# Altium PCB PCB_Updated.PcbDoc
Units mm, origin at the board's own origin, x right, y up, seen from the top; angles counter-clockwise.
Board outline 80 x 85 mm, 2 copper layers (Top Layer, Bottom Layer); 18 components, 12 nets, 89 pads, 5 vias.
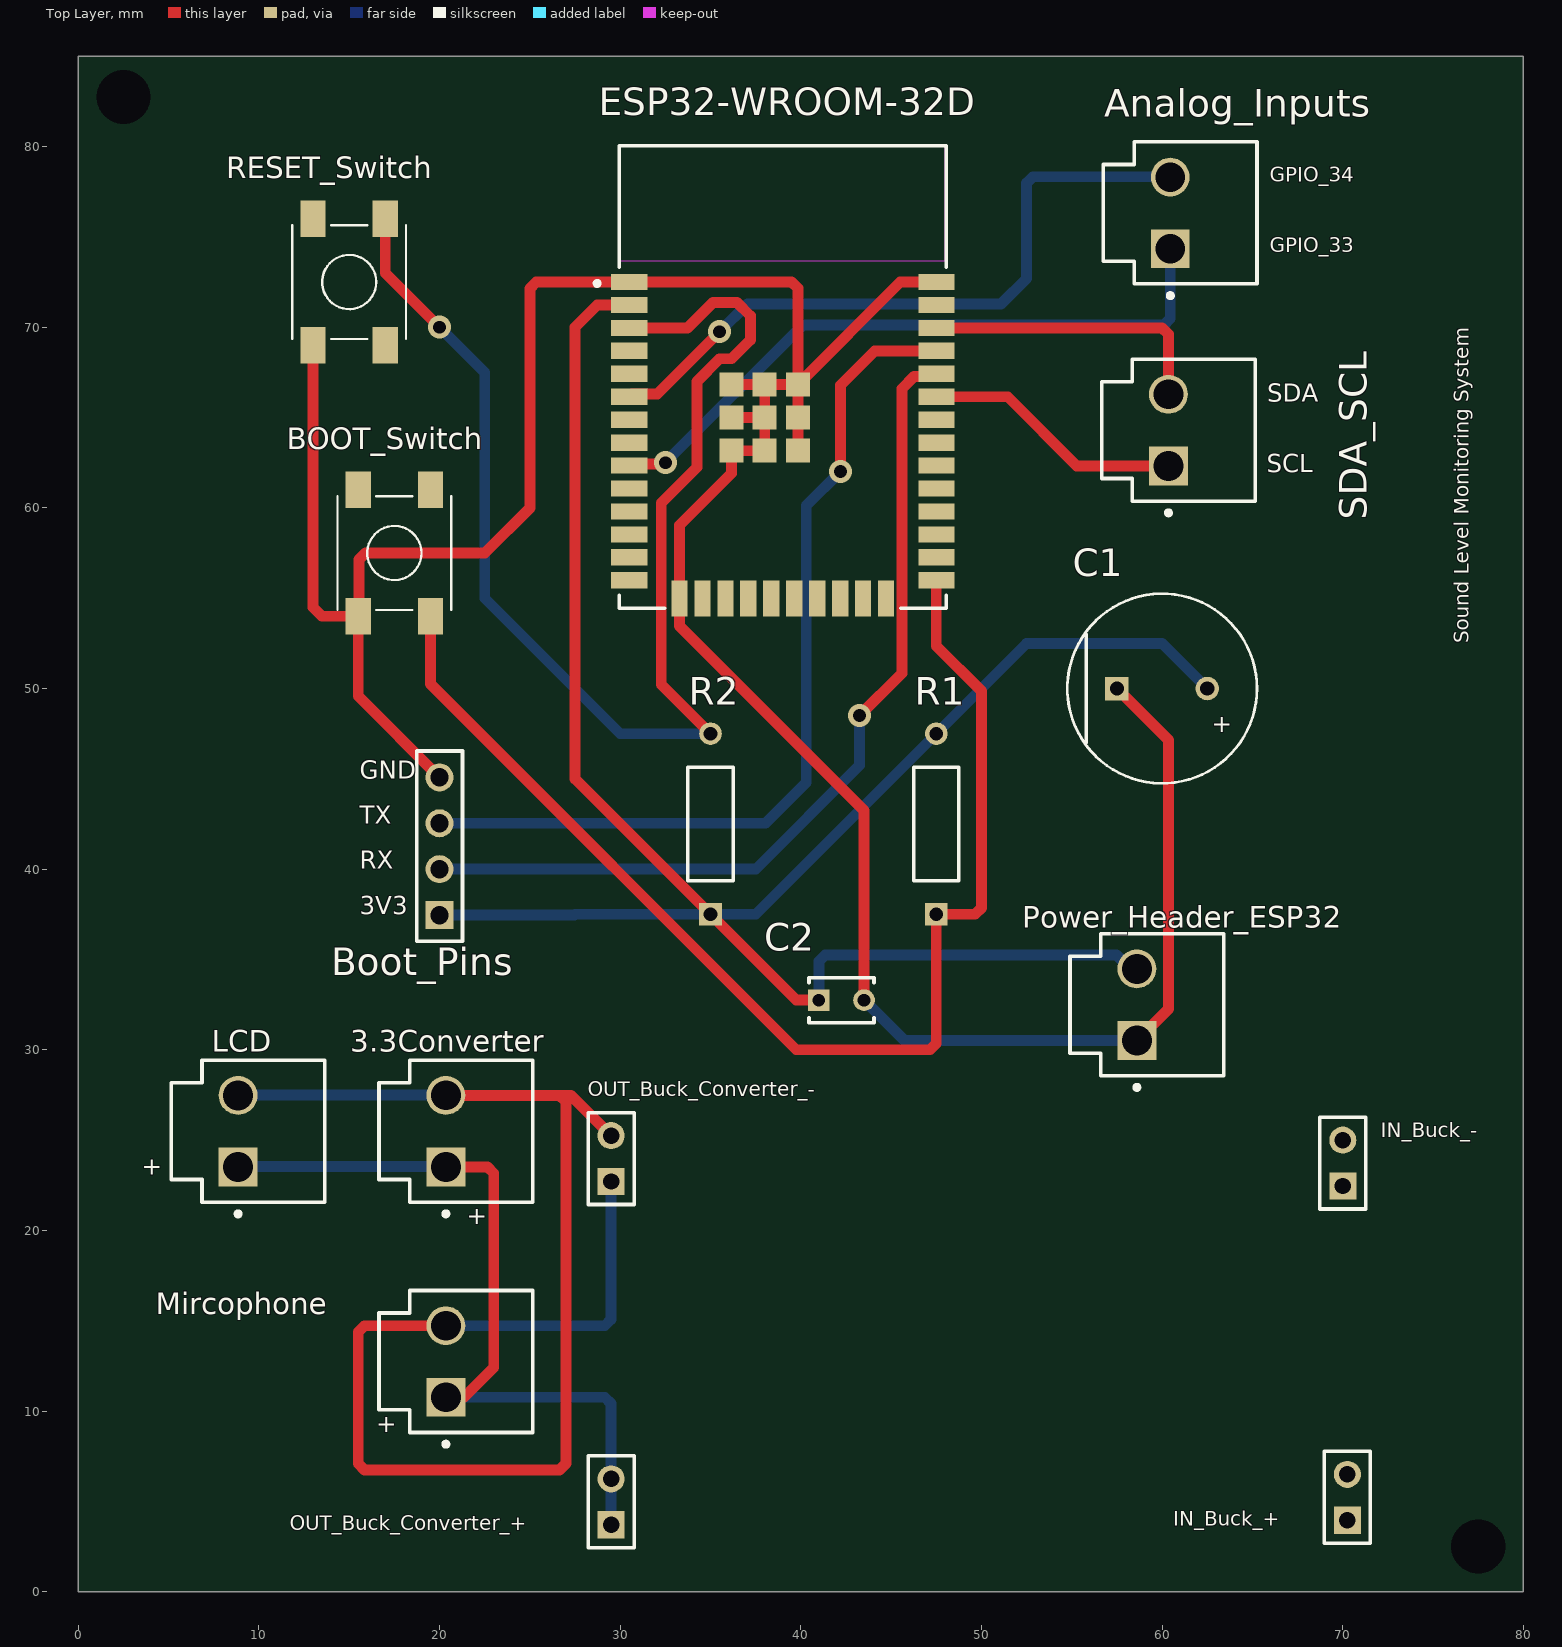
[diagram p0: Top Layer view]
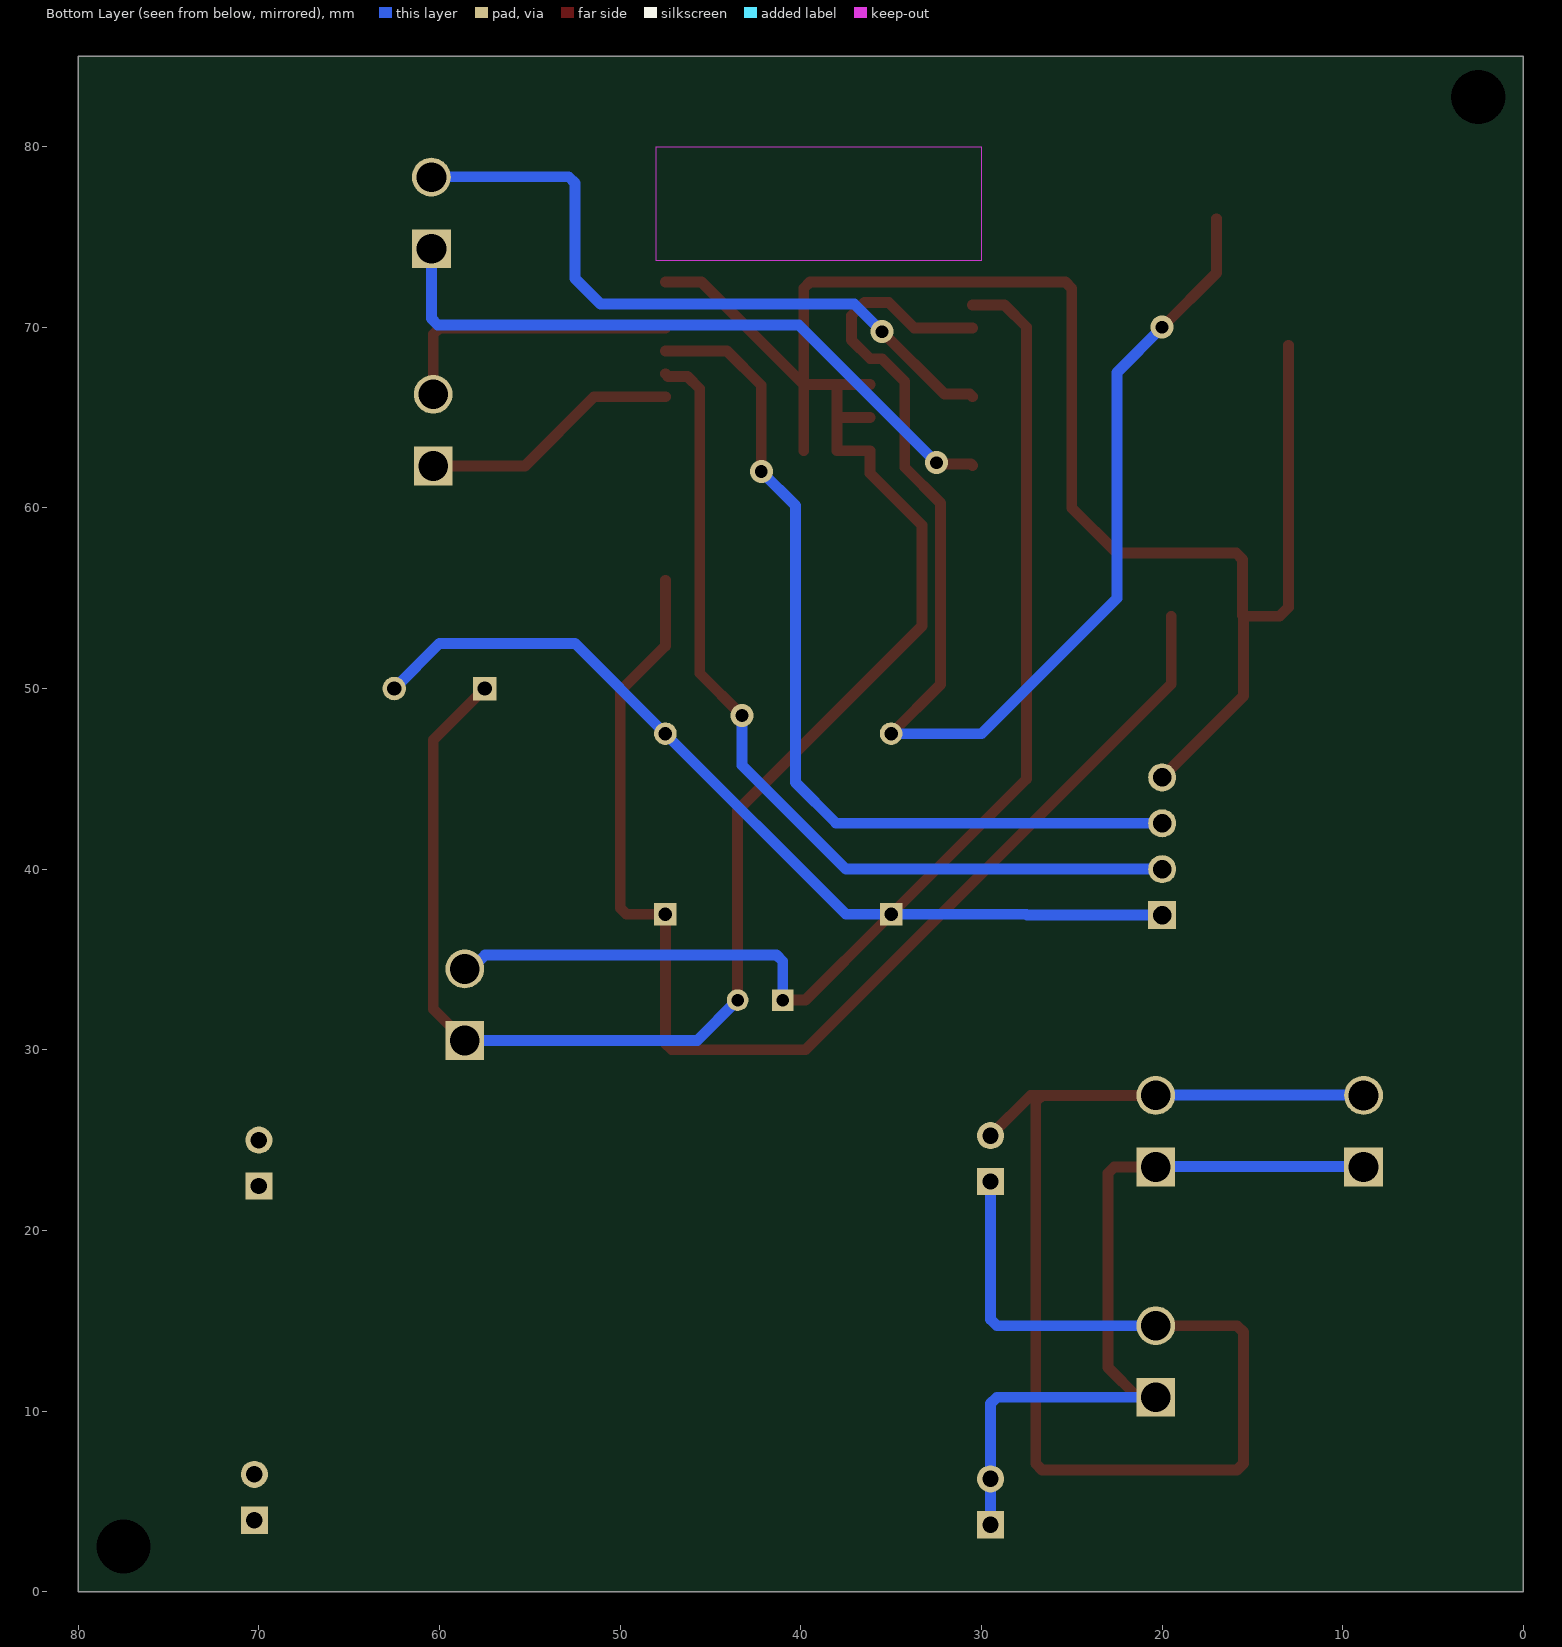
[diagram p1: Bottom Layer view, seen from below]
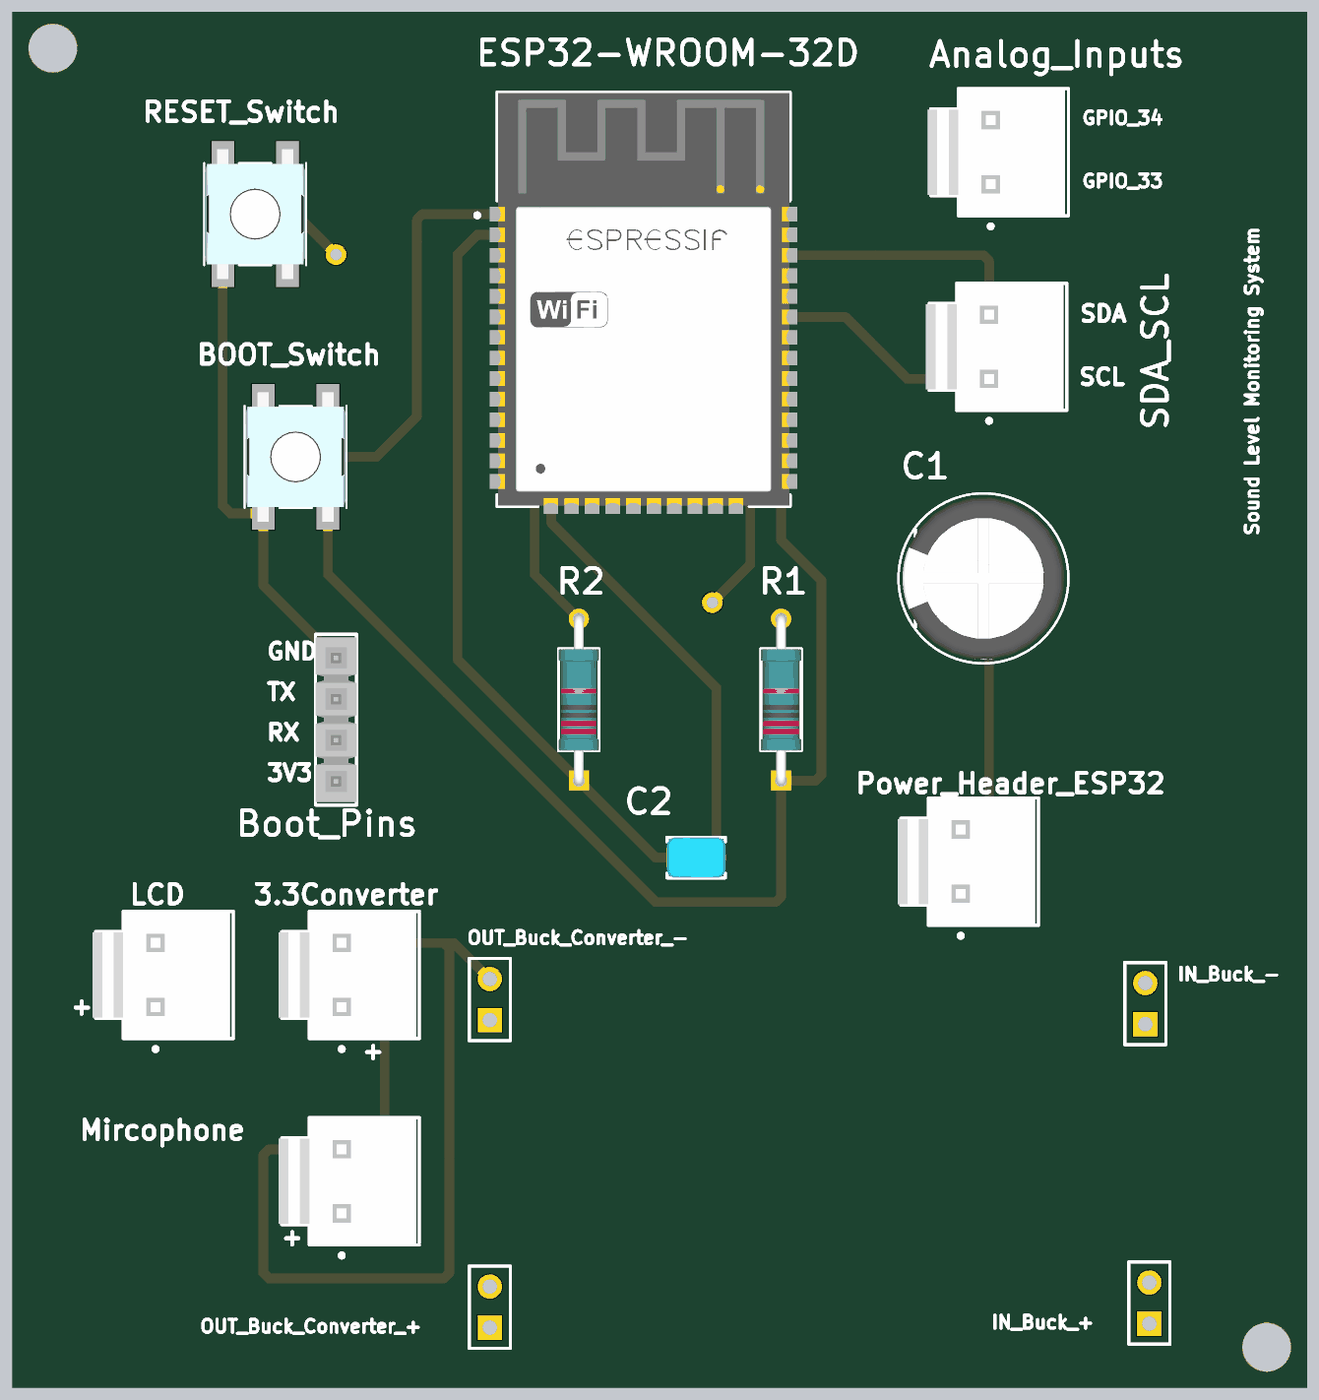
[diagram p2: 3D render of the assembled board from above, using the file's embedded part models]

## Layer stack, top to bottom
Top Solder: solder mask 0.0102, Solder Resist, Dk 3.5
Top Layer: signal copper 0.0356
Dielectric 1: dielectric 0.32, FR-4, Dk 4.8
Bottom Layer: signal copper 0.0356
Bottom Solder: solder mask 0.0102, Solder Resist, Dk 3.5

## Board outline
0,0 80,0 80,85 0,85

## Design rules (kind name [scope] priority, off if disabled: settings)
BoardOutlineClearance [All] p1: gap=0.2 ignorepadtopadclearanceinfootprint=FALSE
Clearance [All] p1: gap=0.127 ignorepadtopadclearanceinfootprint=FALSE except(0.25: Arc-Hole Track-Hole SMDPad-Hole THPad-Hole Via-Hole Fill-Hole Poly-Hole Region-Hole Text-Hole)
ComponentClearance [All] p1: gap=0.127 collisioncheckmode=3 verticalgap=0.127 showdistances=TRUE
DiffPairsRouting [All] p1: maxlimit=0.254 minlimit=0.127 mostfreqgap=0.127 toplayer_minwidth=0.127 toplayer_maxwidth=25.4 toplayer_prefwidth=0.127 bottomlayer_minwidth=0.127 bottomlayer_maxwidth=25.4 bottomlayer_prefwidth=0.127 maxuncoupledlength=12.7
Height [All] p1: minheight=0 maxheight=1816.048 prefheight=12.7
HoleSize [All] p1: absolutevalues=TRUE maxlimit=6.3 minlimit=0.3 maxpercent=80.000 minpercent=20.000
HoleToHoleClearance [All] p1: gap=0.25 allowstackedmicrovias=FALSE
MinimumAnnularRing [All] p1: minimumring=0.076
MinimumSolderMaskSliver [All] p1: minsoldermaskwidth=0
PlaneClearance [All] p1: clearance=0.127
PlaneConnect PlaneConnectPowerPads [InPadClass('PowerPads')] p1: planeconnectstyle=Direct reliefexpansion=0.508 reliefentries=4 reliefconductorwidth=0.254 reliefairgap=0.254
PlaneConnect [All] p2: pad.planeconnectstyle=Relief pad.reliefexpansion=0.3 pad.reliefentries=4 pad.reliefconductorwidth=0.127 pad.reliefairgap=0.127 via.planeconnectstyle=Direct via.reliefexpansion=0.3 via.reliefentries=4 via.reliefconductorwidth=0.127 via.reliefairgap=0.127
PolygonConnect PolygonConnectPowerPads [All vs (InPadClass('PowerPads'))] p1: connectstyle=Direct reliefconductorwidth=0.254 reliefentries=4 polygonreliefangle="90 Angle" airgapwidth=0.254
PolygonConnect [All] p2: thpad.connectstyle=Relief thpad.reliefconductorwidth=0.127 thpad.reliefentries=4 thpad.polygonreliefangle="90 Angle" thpad.airgapwidth=0.127 smdpad.connectstyle=Relief smdpad.reliefconductorwidth=0.127 smdpad.reliefentries=4 smdpad.polygonreliefangle="90 Angle" smdpad.airgapwidth=0.127 via.connectstyle=Direct via.reliefconductorwidth=0.127 via.reliefentries=4 via.polygonreliefangle="90 Angle" via.airgapwidth=0.127
RoomDefinition V3 [InComponentClass('V3')] p1: confinementstyle=ConfineIn formatcopy=TRUE lockcomponents=FALSE outline -0.225,0.05 80.125,0.05 80.125,85.125 -0.225,85.125
RoutingVias [All] p1: holewidth=0.3 width=0.6 viastyle="Through Hole" minholewidth=0.3 minwidth=0.6 maxholewidth=0.6 maxwidth=6.6
SilkToSilkClearance [All] p1: silktosilkclearance=0
SilkToSolderMaskClearance [IsPad] p1: minsilkscreentomaskgap=0.127 clearancetoexposedcopper=TRUE
SolderMaskExpansion [All] p1: expansion=0.075 istentingtop=FALSE
Width [All] p1: maxlimit=25.4 minlimit=0.127 preferedwidth=0.6 minimp=50.000000 maximp=50.000000 favimp=50.000000
20 further rules are at their usual default settings.

## Components (designator, comment, footprint, x,y, rotation, side; value= is the part's Value field where it differs from the comment)
3.3Converter "B2P-VH(LF)(SN)" JST-B2P-VH(LF)(SN)_V 21.75,25.5 r90 top
Analog_Inputs "B2P-VH(LF)(SN)" JST-B2P-VH(LF)(SN)_V 61.85,76.325 r90 top
Boot_Pins "TSW-104-08-L-S" SMTC-TSW-104-08-X-S 20,37.46 r90 top
BOOT_Switch "430471025826" 430471025826 17.5,57.5 r90 top
C1 "10uF" FP-RAD-TH-D_10_0_5-L_16_1-MFG 60,50 r0 top
C2 "0.1uF" FP-RCE0DB-MFG 42.25,32.75 r0 top
ESP32-WROOM-32D "ESP32-WROOM-32D" FP-ESP32-WROOM-32D-MFG 39,67.24 r0 top
IN_Buck_+ "Header 2" HDR1X2 70.25,3.96 r90 top
IN_Buck_- "Header 2" HDR1X2 70,22.46 r90 top
LCD "B2P-VH(LF)(SN)" JST-B2P-VH(LF)(SN)_V 10.25,25.5 r90 top
Mircophone "B2P-VH(LF)(SN)" JST-B2P-VH(LF)(SN)_V 21.75,12.75 r90 top
OUT_Buck_Converter_+ "Header 2" HDR1X2 29.5,3.71 r90 top
OUT_Buck_Converter_- "Header 2" HDR1X2 29.5,22.71 r90 top
Power_Header_ESP32 "B2P-VH(LF)(SN)" JST-B2P-VH(LF)(SN)_V 60,32.5 r90 top
R1 "10k" FP-MBB0207-MFG 47.5,42.5 r90 top
R2 "10k" FP-MBB0207-MFG 35,42.5 r90 top
RESET_Switch "430471025826" 430471025826 15,72.5 r90 top
SDA_SCL "B2P-VH(LF)(SN)" JST-B2P-VH(LF)(SN)_V 61.75,64.305 r90 top

## Footprints (in the part's own frame and the unit in brackets; to place one, negate y for a bottom-side part, rotate by r counter-clockwise, add the part's x,y. Pads: shape width x height; smd on the part's side, far side on the other; paste and mask are expansions set on the pad)
430471025826 [mm] "6*6mm vertical type,SMD, height 2.5mm, white actuator, 260gf, T&R"
  rect 2x1.4 smd: 1(-3.5,2) 2(3.5,2) 3(-3.5,-2) 4(3.5,-2)
  silkscreen extent -3.15,-3.15 3.15,3.15, body extent -4,-3.1 4,3.1, height 2.49
FP-ESP32-WROOM-32D-MFG [mm]
  rect 2x0.9 smd paste+0 mask+0: 1(-8.5,5.26) 2(-8.5,3.99) 3(-8.5,2.72) 4(-8.5,1.45) 5(-8.5,0.18) 6(-8.5,-1.09) 7(-8.5,-2.36) 8(-8.5,-3.63) 9(-8.5,-4.9) 10(-8.5,-6.17) 11(-8.5,-7.44) 12(-8.5,-8.71) 13(-8.5,-9.98) 14(-8.5,-11.25) 25(8.5,-11.25) 26(8.5,-9.98) 27(8.5,-8.71) 28(8.5,-7.44) 29(8.5,-6.17) 30(8.5,-4.9) 31(8.5,-3.63) 32(8.5,-2.36) 33(8.5,-1.09) 34(8.5,0.18) 35(8.5,1.45) 36(8.5,2.72) 37(8.5,3.99) 38(8.5,5.26)
  rect 0.9x2 smd paste+0 mask+0: 15(-5.715,-12.25) 16(-4.445,-12.25) 17(-3.175,-12.25) 18(-1.905,-12.25) 19(-0.635,-12.25) 20(0.635,-12.25) 21(1.905,-12.25) 22(3.175,-12.25) 23(4.445,-12.25) 24(5.715,-12.25)
  rect 1.33x1.33 smd paste+0 mask+0: 39(-2.835,-4.075) 39(-2.835,-2.24) 39(-2.835,-0.405) 39(-1,-4.075) 39(-1,-2.24) 39(-1,-0.405) 39(0.835,-4.075) 39(0.835,-2.24) 39(0.835,-0.405)
  Keep-Out Layer region: -9,6.45 9,6.45 9,12.75 -9,12.75
  Keep-Out Layer region: -9,6.45 9,6.45 9,12.75 -9,12.75
  silkscreen extent -10.4,-12.8 9.05,12.8, body extent -9.6,-13.35 9.6,12.9, height 0.25
FP-MBB0207-MFG [mm]
  rect 1.25x1.25 hole 0.75 paste-1000 mask+0: 1(-5,0)
  round 1.25 hole 0.75 paste-1000 mask+0: 2(5,0)
  silkscreen extent -3.15,-1.25 3.15,1.25, body extent -5.72,-1.35 5.72,1.35, height 0.25
FP-RAD-TH-D_10_0_5-L_16_1-MFG [mm]
  rect 1.3x1.3 hole 0.8 paste-1000 mask+0: 1(-2.5,0)
  round 1.3 hole 0.8 paste-1000 mask+0: 2(2.5,0)
  silkscreen extent -5.25,-5.25 5.25,5.25, body extent -5.35,-5.35 5.35,5.35, height 0.25
FP-RCE0DB-MFG [mm]
  rect 1.2x1.2 hole 0.7 paste-1000 mask+0: 1(-1.25,0)
  round 1.2 hole 0.7 paste-1000 mask+0: 2(1.25,0)
  silkscreen extent -1.8,-1.25 1.8,1.25, body extent -1.95,-1.35 1.95,1.35, height 0.25
HDR1X2 [mm] "Connector; Header; 2 Position"
  rect 1.5x1.5 hole 0.9: 1(0,0)
  round 1.5 hole 0.9: 2(2.54,0)
  silkscreen extent -1.27,-1.27 3.81,1.27
JST-B2P-VH(LF)(SN)_V [mm] "THD, 2-Leads, Body 8.5x7.86mm, Pitch 3.96mm"
  rect 2.15x2.15 hole 1.65: 1(-1.98,1.4)
  round 2.15 hole 1.65: 2(1.98,1.4)
  silkscreen extent -4.7,-3.4 3.93,5.1, body extent -3.93,-3.2 3.93,5.3, height 10.9
SMTC-TSW-104-08-X-S [mm] ".025 SQ Post Terminal Strip Assembly, 1x4 Pins, Vertical, 2.54mm Pitch, Male"
  rect 1.55x1.55 hole 1.02: 1(0,0)
  round 1.55 hole 1.02: 2(2.54,0) 3(5.08,0) 4(7.62,0)
  silkscreen extent -1.46,-1.27 9.08,1.27, body extent -1.27,-1.27 8.89,1.27, height 8.38

## Part data
3.3Converter Analog_Inputs LCD Mircophone Power_Header_ESP32 SDA_SCL: library part CMP-002-00025-2, "Male Header, Pitch 3.96 mm, 1 x 2 Position, Height 10.9 mm, Tail Length 3.7 mm, -25 to 85 degC, RoHS, Bulk", Manufacturer=JST, Max Operating Temperature=85°C, Min Operating Temperature=-25°C, Package Description="Male Header, Pitch 3.96 mm, 1 x 2 Position, Height 10.9 mm, Tail Length 3.7 mm", Case/Package=B2P-VH(LF)(SN), Connector Type=Header, Datasheet URL=http://www.jst-mfg.com/product/pdf/eng/eVH.pdf, Datasheet Version=May-16, Gender=Male, Manufacturer URL=http://www.jst.com/home2.html, Mounting Technology=TH, Package Reference=B2P-VH(LF)(SN), RoHS Compliant=Unknown
Boot_Pins: library part CMP-1024-00358-1, "0.025\" SQ Post Header, Through-hole, Vertical, -55 to 125 degC, 2.54 mm Pitch, 4-Pin, Male, RoHS", Manufacturer=Samtec, Temperature Range="-55 to 125 degC", ComponentLink1Description="Manufacturer URL", ComponentLink1URL=http://www.samtec.com, ComponentLink2Description=Datasheet, ComponentLink2URL=http://www.samtec.com/documents/webfiles/pdf/TSW_TH.PDF, ComponentLink3Description="Package Specification", ComponentLink3URL=http://www.samtec.com/documents/webfiles/cpdf/TSW-XXX-XX-XXX-X-XX-XXX-MKT.pdf, DatasheetVersion=F-214, Mounting Technology=Through-hole, Orientation=Vertical, PackageDescription=".025[0.64] SQ. Post Terminal Strip Assembly", PackageReference=TSW-104-08-X-S, PackageVersion="DM, 8/1988", PartNumber=TSW-104-08-L-S, Pitch="2.54 mm", RoHS=True
BOOT_Switch RESET_Switch: library part CMP-1452-00022-1, "WS-TASV SMD Tact Switch 6X6 mm", Manufacturer="Wuerth Elektronik", ComponentLink1Description="Manufacturer URL", ComponentLink1URL=http://www.we-online.com, ComponentLink2Description=Datasheet, ComponentLink2URL=http://katalog.we-online.de/em/datasheet/4304x1.pdf, NoPins=04, PackageReference=430471025826, PartNumber=430471025826
C1: library part CMP-05427-000979-1, "Aluminum Electrolytic Capacitors (Radial Lead Type) AEC-Q200 Qualified 1000uF ±20% 10V", Capacitance=1mF, Case/Package=Radial, Dielectric Material=Aluminium, ESR (Equivalent Series Resistance)=68mR, Leakage Current=3uA, Max Operating Temperature=105°C, Min Operating Temperature=-55°C, Package Quantity=200, Ratings=AEC-Q200, Ripple Current=1.05A, Tolerance=20%, Voltage=10V, Construction=RADIAL, Contact Plating=Tin, Diameter=10mm, Height=16mm, Height - Seated (Max)=0.63inch, Impedance=68mR, Lead Diameter=0.6mm, Lead Free="Lead Free", Lead Pitch=5mm, Length=16mm, Life (Hours)=3000Hour, Mount="Through Hole", Packaging=Bulk, Radiation Hardening=No, REACH SVHC="No SVHC", RoHS Compliant=Yes, Series=FC, Size=16mm, Termination=Radial, Voltage Rating=10V, Voltage Rating (DC)=10V
C2: library part CMP-06035-048089-1, "Cap Ceramic 100nF 50V X7R ±10% Radial 2.5mm +125°C Ammo Pack", Capacitance=100nF, Case/Package=Radial, Dielectric=X7R, Max Operating Temperature=125°C, Min Operating Temperature=-55°C, Package Quantity=2000, Ratings=AEC-Q200, Resistor Type=Ceramic, Tolerance=10%, Voltage Rating=50V, Height=3.5mm, Height - Seated (Max)=0.138inch, Lead Diameter=0.5mm, Lead Free="Lead Free", Lead Pitch=0.098inch, Lead/Base Style=Straight, Length=0.142inch, Mount="Through Hole", Packaging="Tape and Reel", Termination=Radial, Voltage Rating (DC)=50V, Width=0.098inch
ESP32-WROOM-32D: library part CMP-194065-000003-1, "WIFI MODULE 32MBITS SPI FLASH", Manufacturer="Espressif Systems", Max Frequency=2484MHz, Max Supply Voltage=3.6V, Min Supply Voltage=3V, Nominal Supply Current=500mA, Temperature="-40°C to +85°C", Temperature Range High=+85°C, Temperature Range Low=-40°C, Automotive=No, Bandwidth=72MHz, Category=UNK, ComponentLink2Description=Datasheet, ComponentLink2URL=https://www.espressif.com/sites/default/files/documentation/esp32-wroom-32d_esp32-wroom-32u_datasheet_en.pdf, Data Rate=150Mbits/s, Device Class L1="Integrated Circuits (ICs)", Device Class L2="RF Semiconductors and Devices", Device Class L3=Transceivers, Digikey Description="WIFI MODULE 32MBITS SPI FLASH", Height=3.2mm, Interface=I2C,SPI,UART,Ethernet,I2S,Other, Lead Free=Yes, Manufacturer Part Number=ESP32-WROOM-32D, Mouser Description="Wi-Fi/BT BLE Module ESP32-D0WD, SPI Flash, UART, P", Number Of Adc Channels=16, Number Of Gpio=32, Octopart=https://octopart.com/esp32-wroom-32d-espressif+systems-91040050, Package=ESP32-WROOM-32D, RoHS=TRUE, Sensitivity=-98dBm
IN_Buck_+ IN_Buck_- OUT_Buck_Converter_+ OUT_Buck_Converter_-: library part CMP-307-000070-1, "Header, 2-Pin", Component Type=Standard, Design Item ID="Header 2", LatestRevisionDate=17-Jul-2002, LatestRevisionNote="Re-released for DXP Platform.", Pin Count=2, Publisher="Altium Limited", Source="Miscellaneous Connectors.SchLib"
R1 R2: library part CMP-02408-000035-1, "RES 10K OHM 0.6W 1% AXIAL", Case/Package=Conformal, Max Operating Temperature=155°C, Max Power Dissipation=600mW, Min Operating Temperature=-55°C, Resistance=10kR, Resistance Tolerance=1%, Resistor Type="Metal Film", Temperature Coefficient=50ppm/°C, Voltage Rating=300V, Construction=Cylindrical, Contact Plating=Tin, Diameter=2.5mm, Features="Automotive AEC-Q200", Lead Free="Lead Free", Length=6.5mm, Military Standard=Not, Number of Terminations=2, Packaging="Tape and Reel", Power Rating=600mW, Radiation Hardening=No, RoHS Compliant=Yes, Series="MBB 0207 - Professional", Technology="THIN FILM", Termination=Axial, Tolerance=1%, Voltage Rating (DC)=300V

## Free pads (board coordinates)
  round 1.524 hole 3: 14(2.5,82.75) 15(77.5,2.5)

## Via types
v1: diameter 1.27, hole 0.711, Top Layer to Bottom Layer, 5 vias

## Nets (pads, with @x,y where several pads share a name; then routed paths per layer and width w, separated by ;. In a path a pad name is that pad's centre, name@x,y a point inside that pad or via, vN(x,y) a via of type N, cw(c..) or ccw(c..) an arc to the next point about the centre after c; other vN are vias at no path point)
3V3: Boot_Pins.1 C1.2 C2.1 ESP32-WROOM-32D.2 Power_Header_ESP32.2 R1.2 R2.1 | length 117.1
  Top Layer w0.6: ESP32-WROOM-32D.2 28.73,71.23 27.5,70 27.5,45 R2.1 35.325,37.175 39.75,32.75 C2.1
  Bottom Layer w0.6: Boot_Pins.1 27.476,37.46 27.516,37.5 R2.1 37.5,37.5 R1.2 52.5,52.5 60,52.5 C1.2 ; C2.1 41,34.899 41.351,35.25 57.474,35.25 58.244,34.48 Power_Header_ESP32.2
A_I_1: Analog_Inputs.1 ESP32-WROOM-32D.9 | length 37.2
  Top Layer w0.6: ESP32-WROOM-32D.9 30.58,62.42 32.42,62.42 v1(32.5,62.5)
  Bottom Layer w0.6: v1(32.5,62.5) 32.5,62.512 40.113,70.125 60.099,70.125 60.45,70.476 Analog_Inputs.1
A_I_2: Analog_Inputs.2 ESP32-WROOM-32D.6 | length 38.1
  Top Layer w0.6: ESP32-WROOM-32D.6 30.65,66.3 32.05,66.3 v1(35.5,69.75)
  Bottom Layer w0.6: v1(35.5,69.75) 37.04,71.29 51.088,71.29 52.5,72.701 52.5,77.974 52.851,78.325 Analog_Inputs.2@60.45,78.325
GND: Boot_Pins.4 BOOT_Switch.1 C1.1 C2.2 ESP32-WROOM-32D.1 ESP32-WROOM-32D.15 ESP32-WROOM-32D.38 ESP32-WROOM-32D.39 Power_Header_ESP32.1 RESET_Switch.1 | length 172.3
  Top Layer w0.6: RESET_Switch.1 13,54.5 13.5,54 BOOT_Switch.1 ; Boot_Pins.4 15.5,49.58 BOOT_Switch.1 ; ESP32-WROOM-32D.39@36.165,65 ESP32-WROOM-32D.39@38,65 ; ESP32-WROOM-32D.39@36.165,66.835 ESP32-WROOM-32D.39@38,66.835 ; ESP32-WROOM-32D.39@39.835,63.165 39.835,65 ESP32-WROOM-32D.39@39.835,66.835 ; C2.2 43.5,43.25 33.285,53.465 ESP32-WROOM-32D.15 33.285,59.035 36.165,61.915 36.165,63.165 38,63.165 ESP32-WROOM-32D.39@38,65 ; ESP32-WROOM-32D.38 45.5,72.5 ESP32-WROOM-32D.39@39.835,66.835 ; C1.1 60.344,47.156 60.344,32.264 Power_Header_ESP32.1 ; BOOT_Switch.1 15.549,54.049 15.549,57.149 15.9,57.5 22.5,57.5 25,60 25,72.149 25.351,72.5 ESP32-WROOM-32D.1 39.49,72.5 39.835,72.155 ESP32-WROOM-32D.39@39.835,66.835 ; ESP32-WROOM-32D.39@38,65 ESP32-WROOM-32D.39@38,66.835 ; ESP32-WROOM-32D.39@38,66.835 ESP32-WROOM-32D.39@39.835,66.835
  Bottom Layer w0.6: C2.2 45.73,30.52 Power_Header_ESP32.1
Net3.3Converter_1: 3.3Converter.1 LCD.1 Mircophone.1 OUT_Buck_Converter_+.1 OUT_Buck_Converter_+.2 | length 43.2
  Top Layer w0.6: Mircophone.1@19.746,10.166 Mircophone.1 ; 3.3Converter.1 22.649,23.52 23,23.169 23,12.42 Mircophone.1@21.35,10.77
  Bottom Layer w0.6: LCD.1@8.85,23.54 20.33,23.54 3.3Converter.1 ; Mircophone.1@21.35,10.77 29.149,10.77 29.5,10.419 OUT_Buck_Converter_+.2 OUT_Buck_Converter_+.1
Net3.3Converter_2: 3.3Converter.2 LCD.2 Mircophone.2 OUT_Buck_Converter_-.1 OUT_Buck_Converter_-.2 | length 83.5
  Top Layer w0.6: Mircophone.2 15.851,14.73 15.5,14.379 15.5,7.101 15.851,6.75 26.649,6.75 27,7.101 27,27.129 26.649,27.48 ; 3.3Converter.2 26.649,27.48 ; OUT_Buck_Converter_-.2 27.27,27.48 26.649,27.48
  Bottom Layer w0.6: LCD.2@8.486,27.5 20.33,27.5 3.3Converter.2 ; Mircophone.2 29.149,14.73 29.5,15.081 OUT_Buck_Converter_-.1
NetBOOT_Switch_3: BOOT_Switch.3 ESP32-WROOM-32D.25 R1.1 | length 69.3
  Top Layer w0.6: BOOT_Switch.3 19.5,50.25 39.75,30 47.149,30 47.5,30.351 R1.1 49.649,37.5 50,37.851 50,49.86 47.5,52.36 ESP32-WROOM-32D.25
NetESP32-WROOM-32D_3: ESP32-WROOM-32D.3 R2.2 RESET_Switch.4 | length 73.2
  Top Layer w0.6: RESET_Switch.4 17,72.993 19.993,70 v1(20,70) ; ESP32-WROOM-32D.3 33.725,69.96 35.132,71.368 36.468,71.368 37.205,70.631 37.205,69.299 36.156,68.25 35.5,68.25 34.25,67 34.25,62.25 32.277,60.277 32.277,50.223 R2.2
  Bottom Layer w0.6: v1(20,70) 22.5,67.5 22.5,55 30,47.5 R2.2
RX: Boot_Pins.2 ESP32-WROOM-32D.34 | length 49.7
  Top Layer w0.6: v1(43.25,48.5) 45.592,50.842 45.592,66.592 46.27,67.27 47.35,67.27 ESP32-WROOM-32D.34
  Bottom Layer w0.6: Boot_Pins.2 37.5,40 43.25,45.75 v1(43.25,48.5)
SCL: ESP32-WROOM-32D.33 SDA_SCL.1 | length 14.4
  Top Layer w0.6: ESP32-WROOM-32D.33 51.45,66.15 55.275,62.325 SDA_SCL.1
SDA: ESP32-WROOM-32D.36 SDA_SCL.2 | length 16.3
  Top Layer w0.6: ESP32-WROOM-32D.36 59.999,69.96 60.35,69.609 SDA_SCL.2
TX: Boot_Pins.3 ESP32-WROOM-32D.35 | length 50.1
  Top Layer w0.6: v1(42.188,62.02) 42.188,66.79 44.088,68.69 ESP32-WROOM-32D.35
  Bottom Layer w0.6: Boot_Pins.3 38.044,42.54 40.303,44.799 40.303,60.136 v1(42.188,62.02)
pads on no net: BOOT_Switch.2 BOOT_Switch.4 ESP32-WROOM-32D.4 ESP32-WROOM-32D.5 ESP32-WROOM-32D.7 ESP32-WROOM-32D.8 ESP32-WROOM-32D.10 ESP32-WROOM-32D.11 ESP32-WROOM-32D.12 ESP32-WROOM-32D.13 ESP32-WROOM-32D.14 ESP32-WROOM-32D.16 ESP32-WROOM-32D.17 ESP32-WROOM-32D.18 ESP32-WROOM-32D.19 ESP32-WROOM-32D.20 ESP32-WROOM-32D.21 ESP32-WROOM-32D.22 ESP32-WROOM-32D.23 ESP32-WROOM-32D.24 ESP32-WROOM-32D.26 ESP32-WROOM-32D.27 ESP32-WROOM-32D.28 ESP32-WROOM-32D.29 ESP32-WROOM-32D.30 ESP32-WROOM-32D.31 ESP32-WROOM-32D.32 ESP32-WROOM-32D.37 IN_Buck_+.1 IN_Buck_+.2 IN_Buck_-.1 IN_Buck_-.2 RESET_Switch.2 RESET_Switch.3

## Silkscreen, mask and mechanical layers (free items; w line width, h text height)
Top Overlay:
  text "GPIO_34" at 65.954,78.062 h0.8
  text "GPIO_33" at 65.954,74.162 h0.8
  text "SDA" at 65.829,65.879 h1
  text "SCL" at 65.779,61.979 h1
  text "Sound Level Monitoring System" at 76.979,52.504 h0.8 r90
  text "+" at 62.754,47.587 h1
  text "GND" at 15.598,45.018 h1
  text "TX" at 15.598,42.518 h1
  text "RX" at 15.598,40.018 h1
  text "3V3" at 15.598,37.518 h1
  text "+" at 3.504,23.087 h1
  text "+" at 21.504,20.337 h1
  text "+" at 16.504,8.837 h1